# Allegro board tunnel lighting.brd
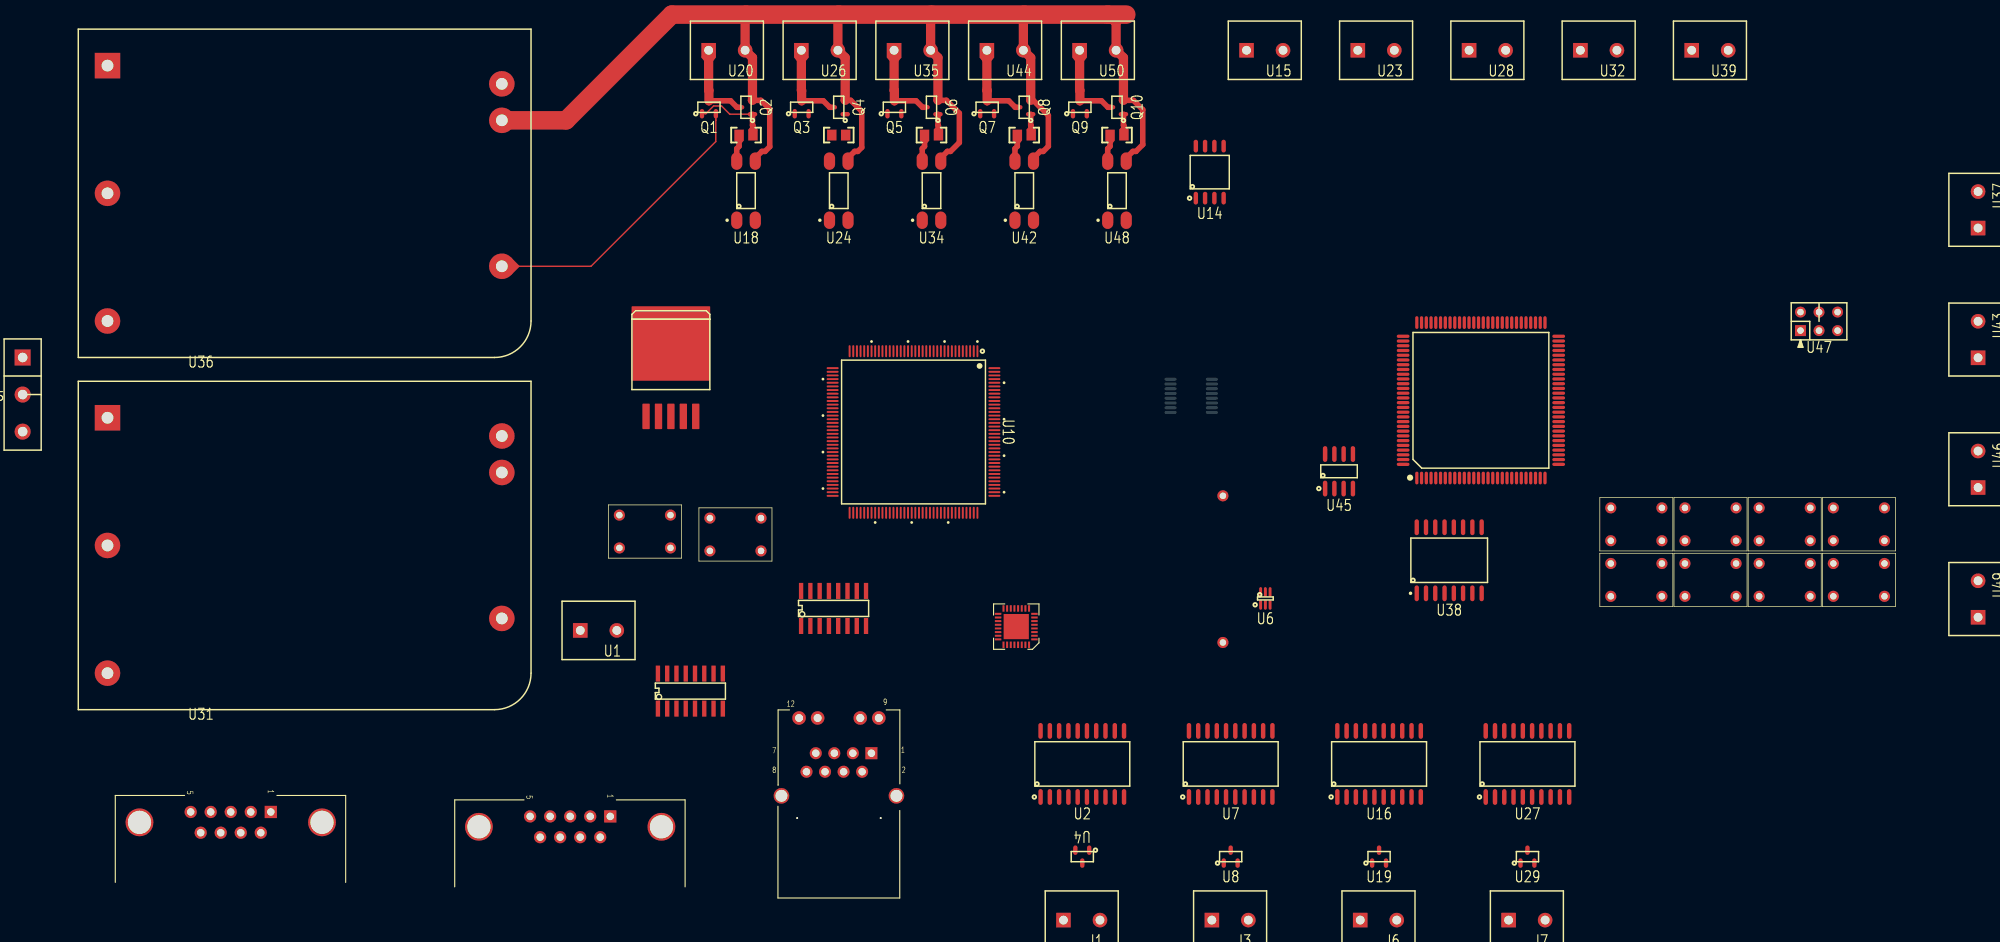
[diagram p0: board, top side]
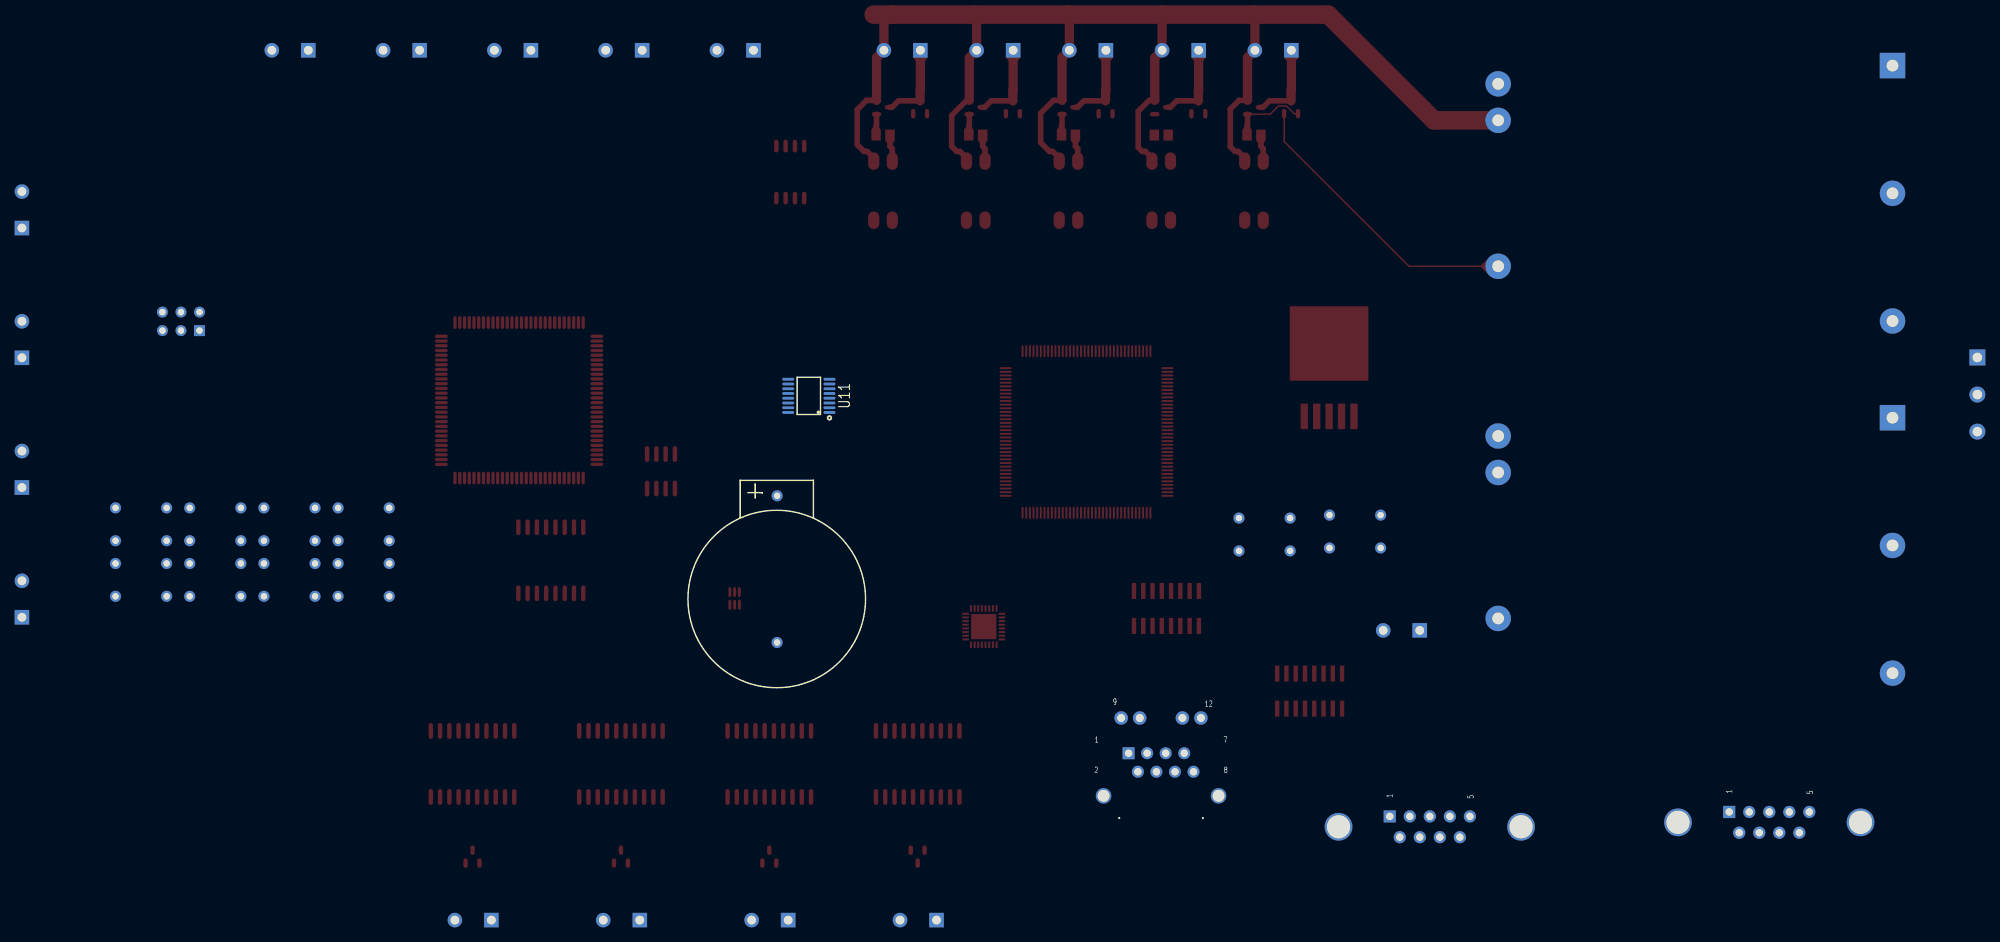
[diagram p1: board, bottom side, seen from below]

No outline. copper layers: TOP, GND, POWER, BOTTOM. Coordinates in mm from the lowest, leftmost part position.

## Placement (name value [footprint] x y rotation side)
J1  CON2  [WJ127_2]  140.03 0 0 top
J2  DB9  [CON_DB9S_RA_318]  33.99 18.82 270 top
J3  CON2  [WJ127_2]  160.35 0 0 top
J4  DB9  [CON_DB9S_RA_318]  80.47 18.21 270 top
J5  RJ45-8  [CON8_RJ45_TH1]  116.23 26.87 0 top
J6  CON2  [WJ127_2]  180.67 0 0 top
J7  CON2  [WJ127_2]  200.99 0 0 top
J8  CON3  [WJ2EDGK]  0 81.1 270 top
Q1  IRLML5203  [SOT95P237X112-3]  93.98 115.39 0 top
Q2  IRLML2803  [SOT95P237X112-3]  99.06 115.39 90 top
Q3  IRLML5203  [SOT95P237X112-3]  106.68 115.39 0 top
Q4  IRLML2803  [SOT95P237X112-3]  111.76 115.39 90 top
Q5  IRLML5203  [SOT95P237X112-3]  119.38 115.39 0 top
Q6  IRLML2803  [SOT95P237X112-3]  124.46 115.39 90 top
Q7  IRLML5203  [SOT95P237X112-3]  132.08 115.39 0 top
Q8  IRLML2803  [SOT95P237X112-3]  137.16 115.39 90 top
Q9  IRLML5203  [SOT95P237X112-3]  144.78 115.39 0 top
Q10  IRLML2803  [SOT95P237X112-3]  149.86 115.39 90 top
R72  10K  [0805]  99.06 111.58 180 top
R86  10K  [0805]  111.76 111.58 180 top
R101  10K  [0805]  124.46 111.58 180 top
R112  10K  [0805]  137.16 111.58 180 top
R134  10K  [0805]  149.86 111.58 180 top
U1  HEADER1X2  [WJ127_2]  73.86 39.7 0 top
U2  ADM2587E  [SOIC127P1032X265-20]  145.11 25.4 0 top
U3  KSZ8041NL  [QFN32EP]  136.07 44.22 180 top
U4  psm712  [SOT95P237X112-3]  145.11 12.7 180 top
U5  MAX3232ECAE  [SOP16_MAX232]  91.44 35.38 90 top
U6  -  [PLR0504F]  170.18 48.08 0 top
U7  ADM2587E  [SOIC127P1032X265-20]  165.43 25.4 0 top
U8  psm712  [SOT95P237X112-3]  165.43 12.7 0 top
U9  MAX3232ECAE  [SOP16_MAX232]  111.05 46.71 90 top
U10  MK60DN512ZVLQ10  [LQFP144NEW]  122 70.89 270 top
U11  txb0106  [TSOP65P640X120-16]  160.02 75.84 90 bottom
U12  BTN  [BUTTON4PIN]  85.22 57.25 0 top
U13  BTN  [BUTTON4PIN]  97.61 56.85 0 top
U14  AT45DB321D  [AT45DB321D_SU]  162.56 106.5 0 top
U15  HEADER1X2  [WJ127_2]  165.1 119.2 0 top
U16  ADM2587E  [SOIC127P1032X265-20]  185.75 25.4 0 top
U18  TLPxxx  [TLP127]  99.06 103.96 0 top
U19  psm712  [SOT95P237X112-3]  185.75 12.7 0 top
U20  HEADER1X2  [WJ127_2]  91.44 119.2 0 top
U22  MC9S12XS 112LPFQ  [LQFP112]  199.69 75.23 90 top
U23  HEADER1X2  [WJ127_2]  180.34 119.2 0 top
U24  TLPxxx  [TLP127]  111.76 103.96 0 top
U26  HEADER1X2  [WJ127_2]  104.14 119.2 0 top
U27  ADM2587E  [SOIC127P1032X265-20]  206.07 25.4 0 top
U28  HEADER1X2  [WJ127_2]  195.58 119.2 0 top
U29  psm712  [SOT95P237X112-3]  206.07 12.7 0 top
U30  TPS7A4533  [TO170P1524X483-6]  88.77 79.58 0 top
U31  ADDC  [ACDC]  7.62 32.84 0 top
U32  HEADER1X2  [WJ127_2]  210.82 119.2 0 top
U34  TLPxxx  [TLP127]  124.46 103.96 0 top
U35  HEADER1X2  [WJ127_2]  116.84 119.2 0 top
U36  ADDC  [ACDC]  7.62 81.1 0 top
U37  HEADER1X2  [WJ127_2]  271.78 96.34 90 top
U38  DS1338C  [SOIC127P1032X265-16]  195.35 53.31 0 top
U39  HEADER1X2  [WJ127_2]  226.06 119.2 0 top
U40  HEADER1X2  [DIANCHI]  164.36 52.1 180 bottom
U42  TLPxxx  [TLP127]  137.16 103.96 0 top
U43  HEADER1X2  [WJ127_2]  271.78 78.56 90 top
U44  HEADER1X2  [WJ127_2]  129.54 119.2 0 top
U45  AT25512  [SOIC127P600X175-8]  180.26 65.51 0 top
U46  HEADER1X2  [WJ127_2]  271.78 60.78 90 top
U47  HEADER2X3  [HDR254M-2X3]  243.46 84.79 0 top
U48  TLPxxx  [TLP127]  149.86 103.96 0 top
U49  HEADER1X2  [WJ127_2]  271.78 43 90 top
U50  HEADER1X2  [WJ127_2]  142.24 119.2 0 top
U51  BTN  [BUTTON4PIN]  220.98 50.62 0 top
U52  BTN  [BUTTON4PIN]  220.98 58.24 0 top
U53  BTN  [BUTTON4PIN]  231.14 58.24 0 top
U54  BTN  [BUTTON4PIN]  241.3 58.24 0 top
U55  BTN  [BUTTON4PIN]  251.46 58.24 0 top
U56  BTN  [BUTTON4PIN]  231.14 50.62 0 top
U57  BTN  [BUTTON4PIN]  241.3 50.62 0 top
U58  BTN  [BUTTON4PIN]  251.46 50.62 0 top

## Library data of the parts
J1 J3 J6 J7 = CON2
J2 J4 = CONN_DB9F_MTGTABS
J5 = J1011F01PNL
J8 = CON3
Q1 Q3 Q5 Q7 Q9 = IRF9Z14/TO_3
Q2 Q4 Q6 Q8 Q10 = 2N6823_1
R72 R86 R101 R112 R134 = R
U1 U15 U20 U23 U26 U28 U32 U35 U37 U39 U40 U43 U44 U46 U49 U50 = HEADER1X2
U2 U7 U16 U27 = ADM2587E
U3 = KSZ8041NL
U4 U8 U19 U29 = psm712
U5 U9 = MAX3232_0
U6 = PLR0504F
U10 = K60
U11 = txb0106
U12 U13 U51-U58 = BTN
U14 = AT45DB321E
U18 U24 U34 U42 U48 = TLP624_1
U22 = xs128_1
U30 = TPS7A45XX_0: User Part Number: pn; Tolerance: RichardLC
U31 U36 = ADDC_0
U38 = DS1338C
U45 = AT25512
U47 = HEADER2X3

## Footprints (pads in the part's own frame, mm; a bottom-side part is the same pattern mirrored in y, then rotated)
0805
  rect 1.3x1.5 smd: 1(-0.95,0) 2(0.95,0)
ACDC
  rect 3.5x3.5 hole 1.6: 1(4,40)
  round 3.5 hole 1.6: 2(4,22.5) 3(4,5) 4(58,12.5) 5(58,32.5) 6(58,37.5)
AT45DB321D_SU
  oval 0.61x1.75 smd: 1(-1.905,-3.565) 2(-0.635,-3.565) 3(0.635,-3.565) 4(1.905,-3.565) 5(1.905,3.565) 6(0.635,3.565) 7(-0.635,3.565) 8(-1.905,3.565)
BUTTON4PIN
  round 1.524 hole 0.889: 1(-3.5,2.25) 2(-3.5,-2.25) 3(3.5,-2.25) 4(3.5,2.25)
CON8_RJ45_TH1
  round 0.254 hole 3.251 unplated: (-10.16,-8.89) (1.27,-8.89)
  rect 1.651x1.651 hole 1.016: 1(0,0)
  round 1.651 hole 1.016: 2(-1.27,-2.54) 3(-2.54,0) 4(-3.81,-2.54) 5(-5.08,0) 6(-6.35,-2.54) 7(-7.62,0) 8(-8.89,-2.54)
  round 1.854 hole 1.092: 9(1.016,4.826) 10(-1.524,4.826) 11(-7.366,4.826) 12(-9.906,4.826)
  round 2.134 hole 1.626: CG1(3.429,-5.842) CG2(-12.319,-5.842)
CON_DB9S_RA_318
  rect 1.676x1.676 hole 1.016: 1(0,0)
  round 1.676 hole 1.016: 2(0,-2.743) 3(0,-5.486) 4(0,-8.23) 5(0,-10.973) 6(2.845,-1.372) 7(2.845,-4.115) 8(2.845,-6.858) 9(2.845,-9.601)
  round 3.81 hole 3.175: M1(1.422,7.01) M2(1.422,-17.983)
DIANCHI
  round 1.524 hole 0.889: 1(0,10.05) 2(0,-10.05)
HDR254M-2X3
  rect 1.5x1.5 hole 0.9: 1(0,0)
  round 1.5 hole 0.9: 2(0,2.54) 3(2.54,0) 4(2.54,2.54) 5(5.08,0) 6(5.08,2.54)
LQFP112
  oval 1.75x0.45 smd: 1(-10.65,8.775) 2(-10.65,8.125) 3(-10.65,7.475) 4(-10.65,6.825) 5(-10.65,6.175) 6(-10.65,5.525) 7(-10.65,4.875) 8(-10.65,4.225) 9(-10.65,3.575) 10(-10.65,2.925) 11(-10.65,2.275) 12(-10.65,1.625) 13(-10.65,0.975) 14(-10.65,0.325) 15(-10.65,-0.325) 16(-10.65,-0.975) 17(-10.65,-1.625) 18(-10.65,-2.275) 19(-10.65,-2.925) 20(-10.65,-3.575) 21(-10.65,-4.225) 22(-10.65,-4.875) 23(-10.65,-5.525) 24(-10.65,-6.175) 25(-10.65,-6.825) 26(-10.65,-7.475) 27(-10.65,-8.125) 28(-10.65,-8.775) 57(10.65,-8.775) 58(10.65,-8.125) 59(10.65,-7.475) 60(10.65,-6.825) 61(10.65,-6.175) 62(10.65,-5.525) 63(10.65,-4.875) 64(10.65,-4.225) 65(10.65,-3.575) 66(10.65,-2.925) 67(10.65,-2.275) 68(10.65,-1.625) 69(10.65,-0.975) 70(10.65,-0.325) 71(10.65,0.325) 72(10.65,0.975) 73(10.65,1.625) 74(10.65,2.275) 75(10.65,2.925) 76(10.65,3.575) 77(10.65,4.225) 78(10.65,4.875) 79(10.65,5.525) 80(10.65,6.175) 81(10.65,6.825) 82(10.65,7.475) 83(10.65,8.125) 84(10.65,8.775)
  oval 0.45x1.75 smd: 29(-8.775,-10.65) 30(-8.125,-10.65) 31(-7.475,-10.65) 32(-6.825,-10.65) 33(-6.175,-10.65) 34(-5.525,-10.65) 35(-4.875,-10.65) 36(-4.225,-10.65) 37(-3.575,-10.65) 38(-2.925,-10.65) 39(-2.275,-10.65) 40(-1.625,-10.65) 41(-0.975,-10.65) 42(-0.325,-10.65) 43(0.325,-10.65) 44(0.975,-10.65) 45(1.625,-10.65) 46(2.275,-10.65) 47(2.925,-10.65) 48(3.575,-10.65) 49(4.225,-10.65) 50(4.875,-10.65) 51(5.525,-10.65) 52(6.175,-10.65) 53(6.825,-10.65) 54(7.475,-10.65) 55(8.125,-10.65) 56(8.775,-10.65) 85(8.775,10.65) 86(8.125,10.65) 87(7.475,10.65) 88(6.825,10.65) 89(6.175,10.65) 90(5.525,10.65) 91(4.875,10.65) 92(4.225,10.65) 93(3.575,10.65) 94(2.925,10.65) 95(2.275,10.65) 96(1.625,10.65) 97(0.975,10.65) 98(0.325,10.65) 99(-0.325,10.65) 100(-0.975,10.65) 101(-1.625,10.65) 102(-2.275,10.65) 103(-2.925,10.65) 104(-3.575,10.65) 105(-4.225,10.65) 106(-4.875,10.65) 107(-5.525,10.65) 108(-6.175,10.65) 109(-6.825,10.65) 110(-7.475,10.65) 111(-8.125,10.65) 112(-8.775,10.65)
LQFP144NEW
  oval 1.65x0.27 smd: 1(-11.075,8.75) 2(-11.075,8.25) 3(-11.075,7.75) 4(-11.075,7.25) 5(-11.075,6.75) 6(-11.075,6.25) 7(-11.075,5.75) 8(-11.075,5.25) 9(-11.075,4.75) 10(-11.075,4.25) 11(-11.075,3.75) 12(-11.075,3.25) 13(-11.075,2.75) 14(-11.075,2.25) 15(-11.075,1.75) 16(-11.075,1.25) 17(-11.075,0.75) 18(-11.075,0.25) 19(-11.075,-0.25) 20(-11.075,-0.75) 21(-11.075,-1.25) 22(-11.075,-1.75) 23(-11.075,-2.25) 24(-11.075,-2.75) 25(-11.075,-3.25) 26(-11.075,-3.75) 27(-11.075,-4.25) 28(-11.075,-4.75) 29(-11.075,-5.25) 30(-11.075,-5.75) 31(-11.075,-6.25) 32(-11.075,-6.75) 33(-11.075,-7.25) 34(-11.075,-7.75) 35(-11.075,-8.25) 36(-11.075,-8.75) 73(11.075,-8.75) 74(11.075,-8.25) 75(11.075,-7.75) 76(11.075,-7.25) 77(11.075,-6.75) 78(11.075,-6.25) 79(11.075,-5.75) 80(11.075,-5.25) 81(11.075,-4.75) 82(11.075,-4.25) 83(11.075,-3.75) 84(11.075,-3.25) 85(11.075,-2.75) 86(11.075,-2.25) 87(11.075,-1.75) 88(11.075,-1.25) 89(11.075,-0.75) 90(11.075,-0.25) 91(11.075,0.25) 92(11.075,0.75) 93(11.075,1.25) 94(11.075,1.75) 95(11.075,2.25) 96(11.075,2.75) 97(11.075,3.25) 98(11.075,3.75) 99(11.075,4.25) 100(11.075,4.75) 101(11.075,5.25) 102(11.075,5.75) 103(11.075,6.25) 104(11.075,6.75) 105(11.075,7.25) 106(11.075,7.75) 107(11.075,8.25) 108(11.075,8.75)
  oval 0.27x1.65 smd: 37(-8.75,-11.075) 38(-8.25,-11.075) 39(-7.75,-11.075) 40(-7.25,-11.075) 41(-6.75,-11.075) 42(-6.25,-11.075) 43(-5.75,-11.075) 44(-5.25,-11.075) 45(-4.75,-11.075) 46(-4.25,-11.075) 47(-3.75,-11.075) 48(-3.25,-11.075) 49(-2.75,-11.075) 50(-2.25,-11.075) 51(-1.75,-11.075) 52(-1.25,-11.075) 53(-0.75,-11.075) 54(-0.25,-11.075) 55(0.25,-11.075) 56(0.75,-11.075) 57(1.25,-11.075) 58(1.75,-11.075) 59(2.25,-11.075) 60(2.75,-11.075) 61(3.25,-11.075) 62(3.75,-11.075) 63(4.25,-11.075) 64(4.75,-11.075) 65(5.25,-11.075) 66(5.75,-11.075) 67(6.25,-11.075) 68(6.75,-11.075) 69(7.25,-11.075) 70(7.75,-11.075) 71(8.25,-11.075) 72(8.75,-11.075) 109(8.75,11.075) 110(8.25,11.075) 111(7.75,11.075) 112(7.25,11.075) 113(6.75,11.075) 114(6.25,11.075) 115(5.75,11.075) 116(5.25,11.075) 117(4.75,11.075) 118(4.25,11.075) 119(3.75,11.075) 120(3.25,11.075) 121(2.75,11.075) 122(2.25,11.075) 123(1.75,11.075) 124(1.25,11.075) 125(0.75,11.075) 126(0.25,11.075) 127(-0.25,11.075) 128(-0.75,11.075) 129(-1.25,11.075) 130(-1.75,11.075) 131(-2.25,11.075) 132(-2.75,11.075) 133(-3.25,11.075) 134(-3.75,11.075) 135(-4.25,11.075) 136(-4.75,11.075) 137(-5.25,11.075) 138(-5.75,11.075) 139(-6.25,11.075) 140(-6.75,11.075) 141(-7.25,11.075) 142(-7.75,11.075) 143(-8.25,11.075) 144(-8.75,11.075)
PLR0504F
  oval 0.4x1.36 smd: 1(-0.65,-0.87) 2(0,-0.87) 3(0.65,-0.87) 4(0.65,0.87) 5(0,0.87) 6(-0.65,0.87)
QFN32EP
  rect 0.889x0.279 smd: 1(-2.489,1.75) 2(-2.489,1.252) 3(-2.489,0.752) 4(-2.489,0.251) 5(-2.489,-0.251) 6(-2.489,-0.752) 7(-2.489,-1.252) 8(-2.489,-1.75) 17(2.489,-1.75) 18(2.489,-1.252) 19(2.489,-0.752) 20(2.489,-0.251) 21(2.489,0.251) 22(2.489,0.752) 23(2.489,1.252) 24(2.489,1.75)
  rect 0.279x0.889 smd: 9(-1.75,-2.489) 10(-1.252,-2.489) 11(-0.752,-2.489) 12(-0.251,-2.489) 13(0.251,-2.489) 14(0.752,-2.489) 15(1.252,-2.489) 16(1.75,-2.489) 25(1.75,2.489) 26(1.252,2.489) 27(0.752,2.489) 28(0.251,2.489) 29(-0.251,2.489) 30(-0.752,2.489) 31(-1.252,2.489) 32(-1.75,2.489)
  rect 3.454x3.454 smd: 33(0,0)
SOIC127P600X175-8
  oval 0.61x2.17 smd: 1(-1.905,-2.365) 2(-0.635,-2.365) 3(0.635,-2.365) 4(1.905,-2.365) 5(1.905,2.365) 6(0.635,2.365) 7(-0.635,2.365) 8(-1.905,2.365)
SOIC127P1032X265-16
  oval 0.6x2.17 smd: 1(-4.445,-4.528) 2(-3.175,-4.528) 3(-1.905,-4.528) 4(-0.635,-4.528) 5(0.635,-4.528) 6(1.905,-4.528) 7(3.175,-4.528) 8(4.445,-4.528) 9(4.445,4.528) 10(3.175,4.528) 11(1.905,4.528) 12(0.635,4.528) 13(-0.635,4.528) 14(-1.905,4.528) 15(-3.175,4.528) 16(-4.445,4.528)
SOIC127P1032X265-20
  oval 0.61x2.17 smd: 1(-5.715,-4.528) 2(-4.445,-4.528) 3(-3.175,-4.528) 4(-1.905,-4.528) 5(-0.635,-4.528) 6(0.635,-4.528) 7(1.905,-4.528) 8(3.175,-4.528) 9(4.445,-4.528) 10(5.715,-4.528) 11(5.715,4.528) 12(4.445,4.528) 13(3.175,4.528) 14(1.905,4.528) 15(0.635,4.528) 16(-0.635,4.528) 17(-1.905,4.528) 18(-3.175,4.528) 19(-4.445,4.528) 20(-5.715,4.528)
SOP16_MAX232
  rect 2.2x0.6 smd: 1(-2.4,4.445) 2(-2.4,3.175) 3(-2.4,1.905) 4(-2.4,0.635) 5(-2.4,-0.635) 6(-2.4,-1.905) 7(-2.4,-3.175) 8(-2.4,-4.445) 9(2.4,-4.445) 10(2.4,-3.175) 11(2.4,-1.905) 12(2.4,-0.635) 13(2.4,0.635) 14(2.4,1.905) 15(2.4,3.175) 16(2.4,4.445)
SOT95P237X112-3
  oval 0.6x1.3 smd: 1(-0.95,-0.885) 2(0.95,-0.885) 3(0,0.885)
TLP127
  oval 1.54x2.4 smd: 1(-1.27,-4.05) 2(1.27,-4.05) 3(1.27,4.05) 4(-1.27,4.05)
TO170P1524X483-6
  custom 1.01x3.49 smd: 1(-3.4,-6.545) 2(-1.7,-6.545) 3(0,-6.545) 4(1.7,-6.545) 5(3.4,-6.545)
  custom 10.77x10.2 smd: 6(0,3.44)
TSOP65P640X120-16
  oval 0.4x1.65 smd: 1(-2.275,-2.825) 2(-1.625,-2.825) 3(-0.975,-2.825) 4(-0.325,-2.825) 5(0.325,-2.825) 6(0.975,-2.825) 7(1.625,-2.825) 8(2.275,-2.825) 9(2.275,2.825) 10(1.625,2.825) 11(0.975,2.825) 12(0.325,2.825) 13(-0.325,2.825) 14(-0.975,2.825) 15(-1.625,2.825) 16(-2.275,2.825)
WJ2EDGK
  rect 2.2x2.2 hole 1.3: 1(0,0)
  round 2.2 hole 1.3: 2(5.08,0) 3(10.16,0)
WJ127_2
  rect 2x2 hole 1.2: 1(2.5,4)
  round 2 hole 1.2: 2(7.5,4)

## Nets
GND: J5.4(CHSGND1) J5.5(CHSGND2) J5.CG1(SHIELD1) J5.CG2(SHIELD2) U2.1(GND1#1) U2.3(GND1#3) U2.9(GND1#9) U2.10(GND1#10) U3.1(GND) U3.33(PAD) U6.2 U7.1(GND1#1) U7.3(GND1#3) U7.9(GND1#9) U7.10(GND1#10) U10.6(VSS#6) U10.17(VSS#17) U10.18(VSS#18) U10.44(VSS#44) U10.57(VSS#57) U10.71(VSS#71) U10.93(VSS#93) U10.107(VSS#107) U10.121(VSS#121) U10.134(VSS#134) U12.2 U12.3 U13.2 U13.3 U16.1(GND1#1) U16.3(GND1#3) U16.9(GND1#9) U16.10(GND1#10) U18.2(CATHODE) U22.14(VSS1) U22.40(VSSX2) U22.44(VSS3) U22.45(VSSPLL) U22.66(VSS2) U22.85(VRL) U22.86(VSSA) U22.97(TEST) U22.106(VSSX1) U24.2(CATHODE) U27.1(GND1#1) U27.3(GND1#3) U27.9(GND1#9) U27.10(GND1#10) U30.3(GND#3) U30.6(GND#6) U31.5(GND) U34.2(CATHODE) U37.2 U38.15(GND) U40.2 U42.2(CATHODE) U43.2 U45.4(GND) U46.2 U47.2 U48.2(CATHODE) U49.2 U51.2 U51.3 U52.2 U52.3 U53.2 U53.3 U54.2 U54.3 U55.2 U55.3 U56.2 U56.3 U57.2 U57.3 U58.2 U58.3
GND2_1: U2.11(GND2#11) U2.14(GND2#14) U2.16(GND2#16) U2.20(GND2#20) U4.3
GND2_2: U7.11(GND2#11) U7.14(GND2#14) U7.16(GND2#16) U7.20(GND2#20) U8.3
GND2_3: U16.11(GND2#11) U16.14(GND2#14) U16.16(GND2#16) U16.20(GND2#20) U19.3
GND2_4: U27.11(GND2#11) U27.14(GND2#14) U27.16(GND2#16) U27.20(GND2#20) U29.3
GND_24V: Q2.2(S) Q4.2(S) Q6.2(S) Q8.2(S) Q10.2(S) U18.3(EMITTER) U20.2 U24.3(EMITTER) U26.2 U34.3(EMITTER) U35.2 U36.5(GND) U42.3(EMITTER) U44.2 U48.3(EMITTER) U50.2
GND_POWER: J2.5 J4.5 U5.15(GND) U9.15(GND) U11.9(GND) U14.7(GND)
VBAT: U38.14(VBAT) U40.1
VCC3V3: J5.9(RLEDA) J5.12(LLEDA) U3.17(VDDIO_3V3)
VCC_3V3: U2.2(VCC#2) U2.8(VCC#8) U5.16(VCC) U7.2(VCC#2) U7.8(VCC#8) U9.16(VCC) U10.5(VDD#5) U10.16(VDD#16) U10.42(VBAT) U10.43(VDD#43) U10.56(VDD#56) U10.70(VDD#70) U10.94(VDD#94) U10.108(VDD#108) U10.122(VDD#122) U10.135(VDD#135) U11.2(VCCA) U14.6(VCC) U30.4(OUT) U30.5(SENSE/ADJ)
VCC_5V: U11.15(VCCB) U16.2(VCC#2) U16.8(VCC#8) U27.2(VCC#2) U27.8(VCC#8) U30.1(S\H\D\N\) U30.2(IN) U31.4(V+) U38.3(VCC) U45.8(VCC) U47.6
VCC_24V: Q1.2(D) Q3.2(D) Q5.2(D) Q7.2(D) Q9.2(D) U36.4(V+)
VDDA: U10.31(VDDA)
VDDA_3V3: U3.3(VDDA_3V3)
VSSA: U10.34(VSSA)
50MHZ_OSC: U3.9(XI/REFCLK) U10.72(PTA18)
A_1: U2.13(Y) U2.18(A)
A_2: U7.13(Y) U7.18(A)
A_3: U16.13(Y) U16.18(A)
A_4: U27.13(Y) U27.18(A)
AD0: U22.67(PAD00/AN00)
AD1: U22.69(PAD01/AN01)
AD2: U22.71(PAD02/AN02)
AD3: U22.73(PAD03/AN03)
AD4: U22.75(PAD04/AN04)
AD5: U22.77(PAD05/AN05)
AD6: U22.79(PAD06/AN06)
AD7: U22.81(PAD07/AN07)
AD8: U22.68(PAD08/AN08)
AD9: U22.70(PAD09/AN09)
AD10: U22.72(PAD10/AN10)
AD11: U22.74(PAD11/AN11)
AD12: U22.76(PAD12/AN12)
AD13: U22.78(PAD13/AN13)
AD14: U22.80(PAD14/AN14)
AD15: U22.82(PAD15/AN15)
B_1: U2.15(Z) U2.17(B)
B_2: U7.15(Z) U7.17(B)
B_3: U16.15(Z) U16.17(B)
B_4: U27.15(Z) U27.17(B)
CLK_K60: U10.141(PTD12) U11.5(A4)
EXTAL32_RTC: U10.41(EXTAL32)
I2C0_SCL: U38.1(SCL)
I2C0_SDA: U38.16(SDA)
I2C1_SCL: U10.115(PTC10)
I2C1_SDA: U10.116(PTC11)
L: J8.1 U31.1(L) U36.1(L)
LED0/NWAYEN: U3.30(LED0/NWAYEN)
LED1/SPEED: U3.31(LED1/SPEED)
MISO0_XS128: U11.10(B6) U22.93(PS4)
MISO_K60: U10.143(PTD14) U11.7(A6)
MODC: U22.23(MODC/BKGD)
MOSI0_XS128: U11.11(B5) U22.94(PS5)
MOSI_K60: U10.142(PTD13) U11.6(A5)
N: J8.2 U31.2(N) U36.2(N)
PA0: U22.57(PA0)
PA1: U22.58(PA1)
PA2: U22.59(PA2)
PA3: U22.60(PA3)
PA4: U22.61(PA4)
PA5: U22.62(PA5)
PA6: U22.63(PA6)
PA7: U22.64(PA7)
PB0: U22.24(PB0)
PB1: U22.25(PB1)
PB2: U22.26(PB2)
PB3: U22.27(PB3)
PB4: U22.28(PB4)
PB5: U22.29(PB5)
PB6: U22.30(PB6)
PB7: U22.31(PB7)
PCS0_K60: U10.140(PTD11) U11.4(A3)
PE0: U22.56(PE0) U55.1
PE1: U22.55(PE1) U56.1
PE2: U22.54(PE2)
PE3: U22.53(PE3) U57.1
PE4: U22.39(PE4/ECLK) U58.1
PE5: U22.38(PE5)
PE6: U22.37(PE6)
PE7: U22.36(PE7)
PH0: U22.52(PH0) U51.1
PH1: U22.51(PH1) U52.1
PH2: U22.50(PH2) U53.1
PH3: U22.49(PH3) U54.1
PH4: U22.35(PH4)
PH5: U22.34(PH5)
PH6: U22.33(PH6)
PH7: U22.32(PH7)
PJ0: U22.22(PJ0)
PJ1: U22.21(PJ1)
PJ6: U11.16(B1) U22.99(PJ6)
PJ7: U11.14(B2) U22.98(PJ7)
PK0: U22.8(PK0)
PK1: U22.7(PK1)
PK2: U22.6(PK2)
PK3: U22.5(PK3)
PK4: U22.20(PK4)
PK5: U22.19(PK5)
PK7: U22.108(PK7)
PM0: U22.105(PM0) U45.1(C\S\)
PM1: U22.104(PM1) U45.6(SCK)
PM2: U22.103(PM2) U45.2(SO)
PM3: U22.102(PM3) U45.5(SI)
PM4: U22.101(PM4) U45.7(H\O\L\D\)
PM5: U22.100(PM5) U45.3(W\P\)
PM6: U22.88(PM6)
PM7: U22.87(PM7)
PP0: U22.4(PWM0/PP0)
PP1: U22.3(PWM1/PP1)
PP2: U22.2(PP2)
PP3: U22.1(PP3)
PP4: U22.112(PP4)
PP5: U22.111(PP5)
PP6: U22.110(PP6)
PP7: U22.109(PP7)
PS0: U22.89(PS0/RXD0)
PS1: U22.90(PS1/TXD0)
PS2: U22.91(PS2/RXD1)
PS3: U22.92(PS3/TXD1)
PS6: U11.12(B4) U22.95(PS6)
PS7: U11.13(B3) U22.96(PS7)
PT0: U22.9(IOC0/PT0)
PT1: U22.10(IOC1/PT1)
PT2: U22.11(IOC2/PT2)
PT3: U22.12(IOC3/PT3)
PT4: U22.15(IOC4/PT4)
PT5: U22.16(PT5)
PT6: U22.17(PT6)
PT7: U22.18(IOC7/PT7)
PTA0: U10.50(PTA0)
PTA1: U10.51(PTA1)
PTA2: U10.52(PTA2)
PTA3: U10.53(PTA3)
PTA4: U10.54(PTA4)
PTA5: U10.55(PTA5)
PTA6: U10.58(PTA6)
PTA7: U10.59(PTA7)
PTA8: U10.60(PTA8)
PTA9: U10.61(PTA9)
PTA10: U10.62(PTA10)
PTA11: U10.63(PTA11)
PTA12: U10.64(PTA12)
PTA13: U10.65(PTA13)
PTA14: U10.66(PTA14)
PTA15: U3.23(TXEN/TX_EN) U10.67(PTA15)
PTA16: U3.24(TXDO/TXD[0]) U10.68(PTA16)
PTA17: U3.25(TXD1/TXD[1]) U10.69(PTA17)
PTA19: U10.73(PTA19) U12.1
PTA24: U3.21(INTRP) U10.75(PTA24)
PTA25: U10.76(PTA25)
PTA26: U10.77(PTA26)
PTA27: U10.78(PTA27)
PTA28: U10.79(PTA28)
PTA29: U10.80(PTA29)
PTB0: U3.11(MDIO) U10.81(PTB0)
PTB1: U3.12(MDC) U10.82(PTB1)
PTB2: U10.83(PTB2)
PTB3: U10.84(PTB3)
PTB4: U10.85(PTB4)
PTB5: U10.86(PTB5)
PTB6: U10.87(PTB6)
PTB7: U10.88(PTB7)
PTB8: U10.89(PTB8)
PTB9: U10.90(PTB9)
PTB10: U10.91(PTB10)
PTB11: U10.92(PTB11)
PTB16: U10.95(PTB16)
PTB17: U10.96(PTB17)
PTB18: U10.97(PTB18)
PTB19: U10.98(PTB19)
PTB20: U10.99(PTB20)
PTB21: U10.100(PTB21)
PTB22: U10.101(PTB22)
PTB23: U10.102(PTB23)
PTC0: U10.103(PTC0)
PTC1: U10.104(PTC1)
PTC2: U10.105(PTC2)
PTC3: U5.12(R1OUT) U10.106(PTC3)
PTC4: U5.11(T1IN) U10.109(PTC4)
PTC5: U10.110(PTC5)
PTC6: U10.111(PTC6)
PTC7: U10.112(PTC7)
PTC8: U10.113(PTC8)
PTC9: U10.114(PTC9)
PTC12: U10.117(PTC12)
PTC13: U10.118(PTC13)
PTC14: U10.119(PTC14)
PTC15: U10.120(PTC15)
PTC16: U9.12(R1OUT) U10.123(PTC16)
PTC17: U9.11(T1IN) U10.124(PTC17)
PTC18: U9.10(T2IN) U10.125(PTC18)
PTC19: U9.9(R2OUT) U10.126(PTC19)
PTD0: U10.127(PTD0)
PTD1: U10.128(PTD1)
PTD2: U10.129(PTD2)
PTD3: U10.130(PTD3)
PTD4: U10.131(PTD4)
PTD5: U10.132(PTD5)
PTD6: U10.133(PTD6)
PTD7: U10.136(PTD7)
PTD8: U10.137(PTD8)
PTD9: U10.138(PTD9) U11.1(A1)
PTD10: U10.139(PTD10) U11.3(A2)
PTD15: U10.144(PTD15) U11.8(OE)
PTE0: U10.1(PTE0)
PTE1: U10.2(PTE1) U14.8(SO)
PTE2: U10.3(PTE2) U14.2(SCK)
PTE3: U10.4(PTE3) U14.1(SI)
PTE4: U10.7(PTE4) U14.4(C\S\)
PTE5: U10.8(PTE5) U14.3(R\E\S\E\T\)
PTE6: U10.9(PTE6) U14.5(W\P\)
PTE7: U10.10(PTE7)
PTE8: U10.11(PTE8)
PTE9: U10.12(PTE9)
PTE10: U10.13(PTE10)
PTE11: U10.14(PTE11)
PTE12: U10.15(PTE12)
PTE24: U10.45(PTE24)
PTE25: U10.46(PTE25)
PTE26: U10.47(PTE26) U13.1
PTE27: U10.48(PTE27)
PTE28: U10.49(PTE28)
RESET_K60: U10.74(RESET_B)
RS232_CTS: J4.7 U9.8(R2IN)
RS232_RTS: J4.8 U9.7(T2OUT)
RS232_RXD: J4.3 U9.13(R1IN)
RS232_TXD: J4.2 U9.14(T1OUT)
RST: U22.42(RESET) U47.4
RX+: J5.7(RD+) U3.5(RX+) U6.4(6)
RX-: J5.8(RD-) U3.4(RX-) U6.3
TRIM_5V: U31.6(TRIM)
TRIM_24V: U36.6(TRIM)
TX+: J5.1(TD+) U3.7(TX+) U6.6(4)
TX-: J5.2(TD-) U3.6(TX-) U6.1
VISO_1: U2.12(VISOOUT) U2.19(VISOIN)
VISO_2: U7.12(VISOOUT) U7.19(VISOIN)
VISO_3: U16.12(VISOOUT) U16.19(VISOIN)
VISO_4: U27.12(VISOOUT) U27.19(VISOIN)
VREF_OUT: U10.37(VREF_OUT)
VREFH: U10.32(VREFH)
VREFL: U10.33(VREFL)
VRH: U22.84(VRH)
XTAL32_RTC: U10.40(XTAL22)
~GND: J8.3 U31.3(~GND) U36.3(~GND)
N16781720: U3.2(VDDPLL_1V8)
N16782615: J5.3(CT-T) J5.6(CT-R)
N16782674: J5.10(RLEDK)
N16782827: J5.11(LLEDK)
N16783190: U3.10(REXT)
N16783726: U3.15(RXD1/RXD[1]/PHYAD2)
N16783729: U3.16(RXD0/RXD[0]/DUPLEX)
N16783833: U3.32(RST#)
N16784306: U3.29(CRS/CONFIG1)
N16784869: U3.18(RXDV/CRSDV/CONFIG2)
N16784889: U3.20(RXER/RX_ER/ISO)
N16903553: J1.2 U4.1
N16903555: J3.2 U8.1
N16903594: J2.3 U1.2 U5.13(R1IN)
N16903596: J2.2 U1.1 U5.14(T1OUT)
N16903608: U5.1(C1+)
N16903614: U5.3(C1-)
N16903616: U5.4(C2+)
N16903618: U5.5(C2-)
N16903723: U5.2(V+)
N16903727: U5.6(V-)
N16903765: J2.M1 J2.M2
N16904637: U2.5(R\E\) U2.6(DE)
N16904676: J1.1 U4.2
N16904791: U2.4(RXD)
N16904823: U2.7(TXD)
N16904937: U9.1(C1+)
N16904943: U9.3(C1-)
N16904945: U9.4(C2+)
N16904947: U9.5(C2-)
N16905038: U9.2(V+)
N16905042: U9.6(V-)
N16905078: J4.M1 J4.M2
N16905221: U7.5(R\E\) U7.6(DE)
N16905285: J3.1 U8.2
N16905419: U7.4(RXD)
N16905454: U7.7(TXD)
N16908797: J6.2 U19.1
N16908807: J7.2 U29.1
N16908848: U15.1
N16909261: U23.1
N16909342: U23.2
N16909360: R72.2 U18.4(COLLECTOR)
N16909405: U18.1(ANODE)
N16909412: U28.1
N16909510: U28.2
N16909611: U32.1
N16909697: Q1.3(S) Q2.3(D) U20.1
N16909711: U32.2
N16909771: U39.1
N16909840: U39.2
N16909878: U37.1
N16909922: U43.1
N16909988: U46.1
N16910032: U49.1
N16910167: Q1.1(G) Q2.1(G) R72.1
N16910202: R86.2 U24.4(COLLECTOR)
N16910212: U24.1(ANODE)
N16910230: Q3.3(S) Q4.3(D) U26.1
N16910285: Q3.1(G) Q4.1(G) R86.1
N16910301: U15.2
N16910317: R101.2 U34.4(COLLECTOR)
N16910323: U34.1(ANODE)
N16910349: Q5.3(S) Q6.3(D) U35.1
N16910403: Q5.1(G) Q6.1(G) R101.1
N16910466: U16.5(R\E\) U16.6(DE)
N16910514: J6.1 U19.2
N16910545: R112.2 U42.4(COLLECTOR)
N16910547: U42.1(ANODE)
N16910620: Q7.3(S) Q8.3(D) U44.1
N16910714: Q7.1(G) Q8.1(G) R112.1
N16910725: U16.4(RXD)
N16910802: U16.7(TXD)
N16910900: U48.1(ANODE)
N16910902: R134.2 U48.4(COLLECTOR)
N16910926: Q9.3(S) Q10.3(D) U50.1
N16910978: Q9.1(G) Q10.1(G) R134.1
N16911043: U27.5(R\E\) U27.6(DE)
N16911092: J7.1 U29.2
N16911207: U27.4(RXD)
N16911254: U27.7(TXD)
N16913511: U22.65(VDD)
N16913540: U22.83(VDDA)
N16913624: U22.41(VDDX2) U22.43(VDDR)
N16913635: U22.46(EXTAL)
N16913637: U22.47(XTAL)
N16913639: U22.48(VDDPLL)
N16913691: U22.107(VDDX1)
N16913850: U22.13(VDDF)
N16914079: U47.3
N1678140027: U3.28(COL/CONFIG0)

Pads without a net: J2 1 4 6 7 8 9; J4 1 4 6 9; U3 8 13 14 19 22 26 27; U5 7 8 9 10; U6 5; U10 19 20 21 22 23 24 25 26 27 28 29 30 35 36 38 39; U12 4; U13 4; U38 2 4 5 6 7 8 9 10 11 12 13; U47 1 5; U51 4; U52 4; U53 4; U54 4; U55 4; U56 4; U57 4; U58 4

## Routing (per net, layer and track width the routed paths; a pad name or vN(x,y) marks a point on that pad's centre or on a via; arc(x,y) is an arc through that point)
GND_24V: length 208.4
  TOP w0.762: Q2.2 101.1,116.34 102.31,115.13 102.31,109.99 101.66,109.35 101.23,109.35 100.33,108.44 U18.3 ; U24.3 113.03,108.44 113.93,109.35 114.36,109.35 114.91,109.89 114.91,114.83 113.4,116.34 Q4.2 ; Q6.2 126.5,116.34 128.27,114.58 128.27,110.55 127.06,109.35 126.63,109.35 125.73,108.44 U34.3 ; Q8.2 138.4,116.34 140.46,114.28 140.46,110.04 139.76,109.35 139.33,109.35 138.43,108.44 U42.3 ; U48.3 151.13,108.44 152.03,109.35 152.46,109.35 153.39,110.27 153.39,115.06 152.11,116.34 Q10.2
  TOP w1.27: 111.76,128.09 111.64,127.97 U26.2 112.65,122.2 Q4.2 ; 99.06,128.09 98.94,127.97 U20.2 99.95,122.2 Q2.2 ; 137.16,128.09 137.04,127.97 U44.2 138.05,122.2 Q8.2 ; Q10.2 150.75,122.2 U50.2 149.74,126.94 148.59,128.09 ; Q6.2 125.35,122.2 U35.2 124.34,127.97 124.46,128.09
  TOP w2.54: U36.5 74.41,113.6 88.9,128.09 151.13,128.09
VCC_24V: length 40.2
  TOP w0.203: Q1.2 94.93,113.63 94.92,113.62 94.92,110.69 77.83,93.6 U36.4
N16909360: length 3.7
  TOP w0.762: R72.2 98.11,110.04 97.79,109.72 U18.4
N16909697: length 11.5
  TOP w0.762: Q2.3 97.82,115.39 96.94,116.28 Q1.3
  TOP w1.27: Q1.3 93.98,117.69 93.94,117.73 U20.1
N16910167: length 10.7
  TOP w0.203: Q1.1 93.56,114.51 94.62,115.57 95.71,115.57 96.84,114.44 Q2.1
  TOP w0.762: Q2.1 99.95,112.91 100.01,112.84 R72.1
N16910230: length 11.5
  TOP w0.762: Q4.3 110.52,115.39 109.64,116.28 Q3.3
  TOP w1.27: U26.1 106.64,117.73 106.68,117.69 Q3.3
N16910317: length 3.7
  TOP w0.762: U34.4 123.19,109.72 123.51,110.04 R101.2
N16910349: length 11.5
  TOP w0.762: Q5.3 122.34,116.28 123.22,115.39 Q6.3
  TOP w1.27: Q5.3 119.38,117.69 119.34,117.73 U35.1
N16910403: length 2.9
  TOP w0.762: R101.1 125.41,112.84 125.35,112.91 Q6.1
N16910545: length 3.7
  TOP w0.762: R112.2 136.21,110.04 135.89,109.72 U42.4
N16910620: length 11.5
  TOP w0.762: Q7.3 135.04,116.28 135.92,115.39 Q8.3
  TOP w1.27: Q7.3 132.08,117.69 132.04,117.73 U44.1
N16910714: length 2.9
  TOP w0.762: R112.1 138.11,112.84 138.05,112.91 Q8.1
N16910902: length 3.7
  TOP w0.762: R134.2 148.91,110.04 148.59,109.72 U48.4
N16910926: length 11.5
  TOP w0.762: Q9.3 147.74,116.28 148.62,115.39 Q10.3
  TOP w1.27: Q9.3 144.78,117.69 144.74,117.73 U50.1
N16910978: length 2.9
  TOP w0.762: Q10.1 150.75,112.91 150.81,112.84 R134.1

## Copper pours and planes (outline as drawn; the poured copper is in the pictures)
GND_24V on TOP (solid shape): 98.49,124.17 98.94,124.35 99.39,124.17 99.65,123.91 98.94,123.04 98.23,123.91
GND_24V on TOP (solid shape): 111.19,124.17 111.64,124.35 112.09,124.17 112.35,123.91 111.64,123.04 110.93,123.91
GND_24V on TOP (solid shape): 123.89,124.17 124.34,124.35 124.79,124.17 125.05,123.91 124.34,123.04 123.63,123.91
GND_24V on TOP (solid shape): 136.59,124.17 137.04,124.35 137.49,124.17 137.75,123.91 137.04,123.04 136.33,123.91
GND_24V on TOP (solid shape): 149.29,124.17 149.74,124.35 150.19,124.17 150.45,123.91 149.74,123.04 149.03,123.91
VCC_24V on TOP (solid shape): 68.02,93.67 68.05,93.6 68.02,93.53 66.86,92.36 65.59,93.6 66.86,94.84
N16909360 on TOP (solid shape): 98.76,110.83 98.26,110.21 98.11,110.18 97.96,110.21 97.46,110.83 98.11,111.68
N16909697 on TOP (solid shape): 94.94,122.2 94.16,121.24 93.94,121.2 93.72,121.24 92.94,122.2 93.94,123.36
N16910167 on TOP (solid shape): 99.86,112.95 100.01,112.98 100.16,112.95 100.66,112.33 100.01,111.49 99.36,112.33
N16910230 on TOP (solid shape): 107.64,122.2 106.86,121.24 106.64,121.2 106.42,121.24 105.64,122.2 106.64,123.36
N16910317 on TOP (solid shape): 124.16,110.83 123.66,110.21 123.51,110.18 123.36,110.21 122.86,110.83 123.51,111.68
N16910349 on TOP (solid shape): 120.34,122.2 119.56,121.24 119.34,121.2 119.12,121.24 118.34,122.2 119.34,123.36
N16910403 on TOP (solid shape): 125.26,112.95 125.41,112.98 125.56,112.95 126.06,112.33 125.41,111.49 124.76,112.33
N16910545 on TOP (solid shape): 136.86,110.83 136.36,110.21 136.21,110.18 136.06,110.21 135.56,110.83 136.21,111.68
N16910620 on TOP (solid shape): 133.04,122.2 132.26,121.24 132.04,121.2 131.82,121.24 131.04,122.2 132.04,123.36
N16910714 on TOP (solid shape): 137.96,112.95 138.11,112.98 138.26,112.95 138.76,112.33 138.11,111.49 137.46,112.33
N16910902 on TOP (solid shape): 149.56,110.83 149.06,110.21 148.91,110.18 148.76,110.21 148.26,110.83 148.91,111.68
N16910926 on TOP (solid shape): 145.74,122.2 144.96,121.24 144.74,121.2 144.52,121.24 143.74,122.2 144.74,123.36
N16910978 on TOP (solid shape): 150.66,112.95 150.81,112.98 150.96,112.95 151.46,112.33 150.81,111.49 150.16,112.33

Small or netless copper shapes (teardrops, artwork), in the pictures only: 5 on TOP
